# EAGLE board ga_panel (EAGLE 9.3.0)
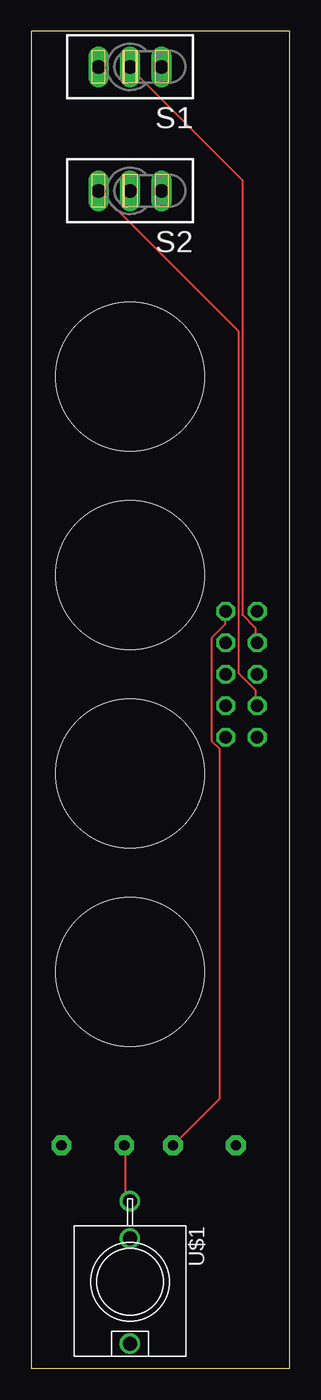
[diagram p0: board, top side]
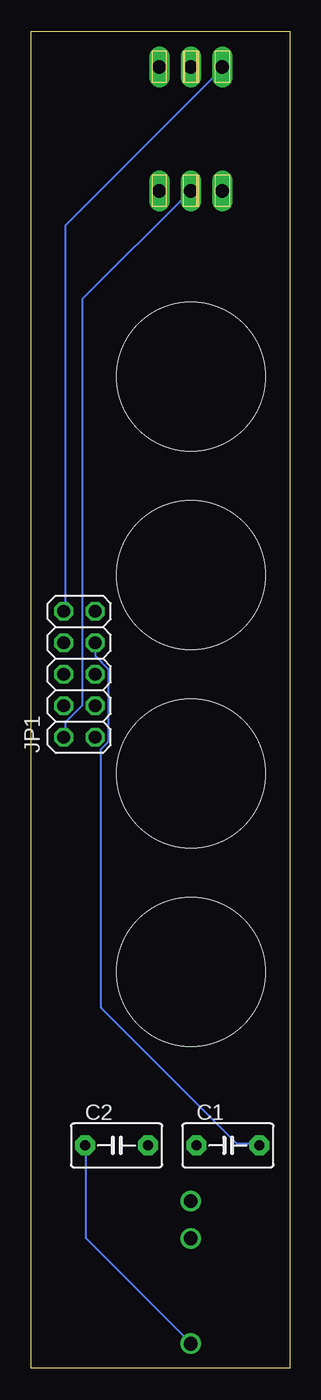
[diagram p1: board, bottom side, seen from below]

Size 20.91 x 107.89 mm. Coordinates in mm from the lower left corner, seen from the top.
Outline: 0,0 20.91,0 20.91,107.89 0,107.89 0,0
Copper layers (1*16): Top 0.035mm / dielectric 1.5mm / Bottom 0.035mm
Design rules "default": minimum track width 6mil, minimum drill 0.35mm, track to track 6mil, track to pad 6mil, pad to pad 6mil, via to via 6mil, smd to smd 6mil, copper to edge 40mil, drill to drill 6mil, minimum pad ring 10mil, minimum via ring 8mil, stop-mask expansion 4mil, vias tented up to drill 0mil, thermal gap 10mil
Holes 12 mm at 8,80 8,64 8,48 8,32
Milling: area 4.9,103.7 to 6,106.3; area 7.5,103.7 to 8.5,106.3; area 10,103.7 to 11.1,106.3; area 8.5,103.7 to 8.6,106.3; area 7.4,103.7 to 7.5,106.3; area 4.9,93.7 to 6,96.3; area 7.5,93.7 to 8.6,96.3; area 7.4,93.7 to 7.5,96.3; area 10,93.7 to 11.1,96.3

## Footprints (pad centres in the part's own frame; a part is rotated, then mirrored left to right if it is on the bottom)
C5B3.5 = drill 0.813 pad 1.6 octagon: 1 -2.54,0; 2 2.54,0
2X05 = drill 1.016 octagon: 1 -5.08,-1.27; 2 -5.08,1.27; 3 -2.54,-1.27; 4 -2.54,1.27; 5 0,-1.27; 6 0,1.27; 7 2.54,-1.27; 8 2.54,1.27; 9 5.08,-1.27; 10 5.08,1.27
TL3XPO = drill 1.1 pad 1.422 long: 1 -2.54,0; 2 0,0; 3 2.54,0
WQP-PJ301M-12_JACK = drill 1.1: P$1 0,5; P$2 0,-3.5; P$3 0,-6.5

## Placement (x,y rotation side)
C1  10uF  [C5B3.5]  5,18 0 bottom
C2  10uF  [C5B3.5]  14,18 0 bottom
JP1  [2X05]  17,56 90 bottom
S1  TL32PO  [TL3XPO]  8,105 180 top
S2  TL32PO  [TL3XPO]  8,95 180 top
U$1  WQP-PJ301M-12_JACK  [WQP-PJ301M-12_JACK]  8,7 180 top

## Library data of the parts
C1 C2 = capacitor-wima
JP1 = pinhead
S1 S2 = switch
U$1 = thonkiconn

## Nets
GND: C1.1 U$1.P$3
N$1: JP1.4 S2.3
N$2: JP1.2 S2.2
N$3: C1.2 JP1.7
N$4: JP1.10 S1.3
N$5: C2.1 U$1.P$1
N$6: C2.2 JP1.9
N$7: JP1.8 S1.2

## Tracks (layer width: path | path; a pad name or v marks a point on that pad's centre or on a via)
GND
  Top 0.152: C1.1 7.62,17.98 7.62,13.87 7.92,13.56 U$1.P$3
N$1
  Top 0.152: JP1.4 18.14,53.49 18.14,54.71 16.76,56.08 16.76,83.67 5.49,94.94 S2.3
N$2
  Bottom 0.152: JP1.2 18.14,51.05 18.14,52.12 16.76,53.49 16.76,86.26 8.08,94.94 S2.2
N$3
  Bottom 0.152: JP1.7 15.7,58.52 15.7,57.45 14.63,56.39 14.63,50.6 15.24,49.99 15.24,29.11 4.27,18.14 2.59,18.14 C1.2
N$4
  Bottom 0.152: JP1.10 18.14,61.11 18.14,92.2 5.49,104.85 S1.3
N$5
  Bottom 0.152: C2.1 16.46,17.98 16.46,10.52 8.08,2.13 U$1.P$1
N$6
  Top 0.152: JP1.9 15.7,60.96 15.7,60.05 14.63,58.98 14.63,50.6 15.24,49.99 15.24,21.79 11.58,18.14 C2.2
N$7
  Top 0.152: JP1.8 18.14,58.67 18.14,59.74 17.07,60.81 17.07,95.86 8.08,104.85 S1.2